# EAGLE board tqfp-32 (EAGLE 6.4)

Size 23.04 x 40.63 mm. Coordinates in mm from the lower left corner, seen from the top.
Outline: 0.13,0 23.04,0 23.04,40.63 0,40.63 0.13,0
Copper layers (1*16): Top 0.035mm / dielectric 1.5mm / Bottom 0.035mm
Design rules "default": minimum track width 10mil, minimum drill 24mil, track to track 8mil, track to pad 8mil, pad to pad 8mil, via to via 8mil, smd to smd 8mil, copper to edge 40mil, drill to drill 8mil, minimum pad ring 10mil, minimum via ring 8mil, stop-mask expansion 4mil, vias tented up to drill 0mil, thermal gap 10mil

## Footprints (pad centres in the part's own frame; a part is rotated, then mirrored left to right if it is on the bottom)
0603-CAP = smd 1.1 x 1: 1 -0.85,0; 2 0.85,0
0603-RES = smd 1.1 x 1: 1 -0.85,0; 2 0.85,0
MA08-1 = drill 1.016 long: 1 -8.89,0; 2 -6.35,0; 3 -3.81,0; 4 -1.27,0; 5 1.27,0; 6 3.81,0; 7 6.35,0; 8 8.89,0
TQFP32-08 = smd 1.27 x 0.559: 1 -4.293,2.8; 2 -4.293,2; 3 -4.293,1.2; 4 -4.293,0.4; 5 -4.293,-0.4; 6 -4.293,-1.2; 7 -4.293,-2; 8 -4.293,-2.8; 17 4.293,-2.8; 18 4.293,-2; 19 4.293,-1.2; 20 4.293,-0.4; 21 4.293,0.4; 22 4.293,1.2; 23 4.293,2; 24 4.293,2.8 | smd 0.559 x 1.27: 9 -2.8,-4.293; 10 -2,-4.293; 11 -1.2,-4.293; 12 -0.4,-4.293; 13 0.4,-4.293; 14 1.2,-4.293; 15 2,-4.293; 16 2.8,-4.293; 25 2.8,4.293; 26 2,4.293; 27 1.2,4.293; 28 0.4,4.293; 29 -0.4,4.293; 30 -1.2,4.293; 31 -2,4.293; 32 -2.8,4.293
USB-MINIB = smd 2.5 x 0.5: D+ 2.5,0; D- 2.5,0.8; GND 2.5,-1.6; ID 2.5,-0.8; VBUS 2.5,1.6 | smd 2.5 x 2: MTN1 -3,4.5; MTN2 2.5,4.5; MTN3 -3,-4.5; MTN4 2.5,-4.5 | hole 0.9: 0,2.2; 0,-2.2
CRYSTAL-SMD-5X3 = smd 1.9 x 1.1: 1 -1.85,-1.15; 2 1.85,-1.15; 3 1.85,1.15; 4 -1.85,1.15

## Placement (x,y rotation side)
C1  0.1uF  [0603-CAP]  6.48,31.75 90 top
R1  [0603-RES]  18.54,20.32 180 top
R2  68  [0603-RES]  15.37,30.48 90 top
R3  68  [0603-RES]  17.91,30.48 90 top
SV1  1-8  [MA08-1]  1.4,30.48 270 top
SV2  9-16  [MA08-1]  1.4,10.16 270 top
SV3  17-24  [MA08-1]  21.72,10.16 90 top
SV4  25-32  [MA08-1]  21.72,30.48 90 top
U1  ATMEGA8U2AU  [TQFP32-08]  11.62,20.27 315 top
X1  USBSMD  [USB-MINIB]  11.56,36.83 270 top
Y1  [CRYSTAL-SMD-5X3]  11.56,29.84 0 top

## Library data of the parts
C1 R1 U1 Y1 = SparkFun
R2 R3 = SparkFun-Passives
SV1-SV4 = con-lstb; OC_FARNELL: unknown; OC_NEWARK: unknown
X1 = SparkFun-Connectors

## Nets
1: U1.1 Y1.3
2: U1.2 Y1.1
3: SV1.3 U1.3
3V3: R1.2 SV1.4
5: SV1.5 U1.5
5V: C1.1 SV1.1 U1.4 U1.31 U1.32 X1.VBUS
6: SV1.6 U1.6
7: SV1.7 U1.7
8: SV1.8 U1.8
9: SV2.1 U1.9
10: SV2.2 U1.10
11: SV2.3 U1.11
12: SV2.4 U1.12
13: SV2.5 U1.13
14: SV2.6 U1.14
18: SV3.2 U1.18
19: SV3.3 U1.19
20: SV3.4 U1.20
21: SV3.5 U1.21
22: SV3.6 U1.22
23: SV3.7 U1.23
25: SV4.1 U1.25
26: SV4.2 U1.26
27: SV4.3 U1.27
28: SV4.4 U1.28
29: R2.1 SV4.5 U1.29
30: R3.1 SV4.6 U1.30
31: SV4.7
32: SV4.8
BUS_D+: R2.2 X1.D+
BUS_D-: R3.2 X1.D-
GND: C1.2 X1.GND
MISO: SV3.1 U1.17
MOSI: SV2.8 U1.16
N$2: SV1.2
RST: R1.1 SV3.8 U1.24
SCK: SV2.7 U1.15

## Tracks (layer width: path | path; a pad name or v marks a point on that pad's centre or on a via)
1  (1 unrouted)
2  (1 unrouted)
3  (1 unrouted)
3V3  (1 unrouted)
5  (1 unrouted)
5V  (5 unrouted)
6  (1 unrouted)
7  (1 unrouted)
8  (1 unrouted)
9  (1 unrouted)
10  (1 unrouted)
11  (1 unrouted)
12  (1 unrouted)
13  (1 unrouted)
14  (1 unrouted)
18  (1 unrouted)
19  (1 unrouted)
20  (1 unrouted)
21  (1 unrouted)
22  (1 unrouted)
23  (1 unrouted)
25  (1 unrouted)
26  (1 unrouted)
27  (1 unrouted)
28  (1 unrouted)
29  (2 unrouted)
30  (2 unrouted)
BUS_D+  (1 unrouted)
BUS_D-  (1 unrouted)
GND  (1 unrouted)
MISO  (1 unrouted)
MOSI  (1 unrouted)
RST  (2 unrouted)
SCK  (1 unrouted)